# EAGLE board triangulator-lm324 (EAGLE 7.6.0)
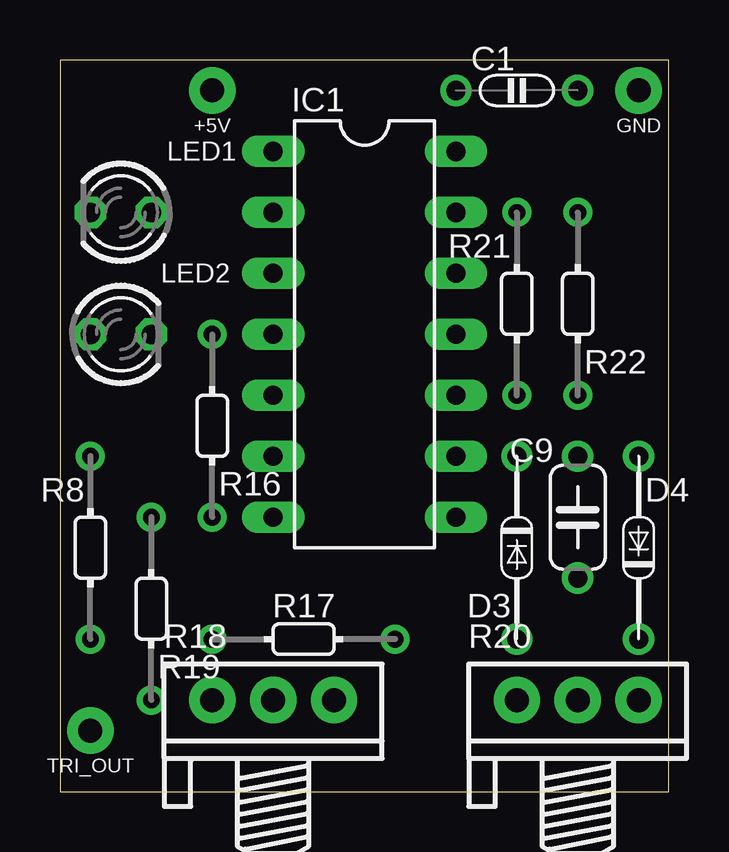
[diagram p0: board, top side]
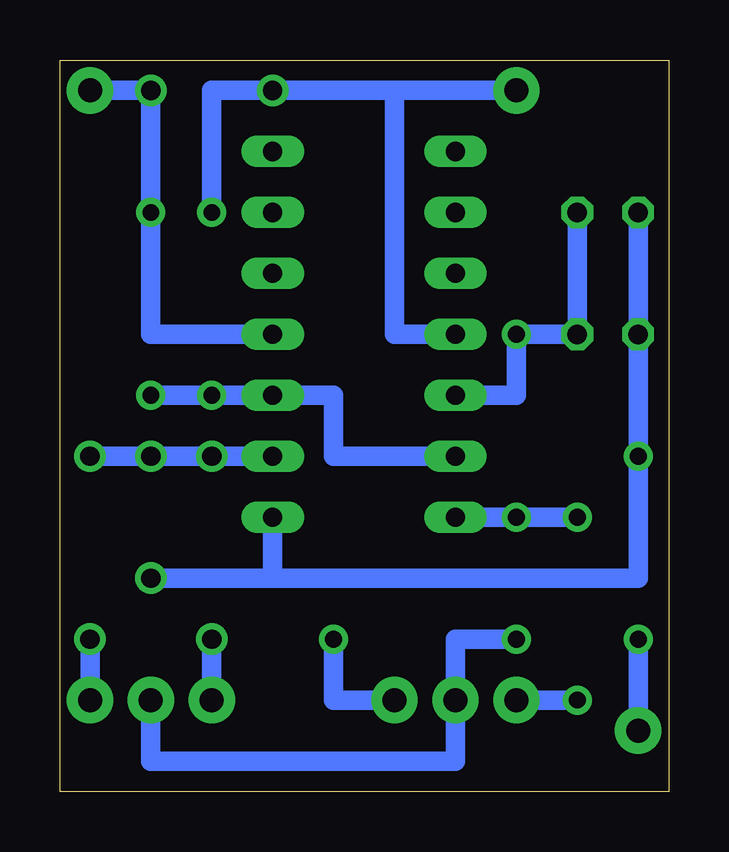
[diagram p1: board, bottom side, seen from below]

Size 25.38 x 30.48 mm. Coordinates in mm from the lower left corner, seen from the top.
Outline: 0,0 25.38,0 25.38,30.48 0,30.48 0,0
Copper layers (1*16): Top 0.035mm / dielectric 1.5mm / Bottom 0.035mm
Design rules "default": minimum track width 10mil, minimum drill 24mil, track to track 8mil, track to pad 8mil, pad to pad 8mil, via to via 8mil, smd to smd 8mil, copper to edge 40mil, drill to drill 8mil, minimum pad ring 10mil, minimum via ring 8mil, stop-mask expansion 4mil, vias tented up to drill 0mil, thermal gap 10mil

## Footprints (pad centres in the part's own frame; a part is rotated, then mirrored left to right if it is on the bottom)
SPAD = drill 1 pad 1.93: 1 0,0
C050-020X036 = drill 0.8: 1 -2.54,0; 2 2.54,0
C050-024X044/V = drill 0.8: 1 0,2.54; 2 0,-2.54
DO34-7V = drill 0.8: A 0,3.81; C 0,-3.81
DIL14 = drill 0.8 long: 1 -3.81,7.62; 2 -3.81,5.08; 3 -3.81,2.54; 4 -3.81,0; 5 -3.81,-2.54; 6 -3.81,-5.08; 7 -3.81,-7.62; 8 3.81,-7.62; 9 3.81,-5.08; 10 3.81,-2.54; 11 3.81,0; 12 3.81,2.54; 13 3.81,5.08; 14 3.81,7.62
LED3MM = drill 0.813 octagon: A -1.27,0; K 1.27,0
0202/7-V = drill 0.7: 1 0,-3.81; 2 0,3.81
0202/7 = drill 0.7: 1 0,3.81; 2 0,-3.81
POT = drill 1 pad 1.93: 1 -2.54,0; 2 0,0; 3 2.54,0

## Placement (x,y rotation side)
+5V  VCC  [SPAD]  6.35,29.21 90 top
C1  100nF  [C050-020X036]  19.05,29.21 0 top
C9  1uF  [C050-024X044/V]  21.59,11.43 0 top
D3  1N4148  [DO34-7V]  19.05,10.16 180 top
D4  1N4148  [DO34-7V]  24.13,10.16 0 top
GND  GND  [SPAD]  24.13,29.21 90 top
IC1  LM324  [DIL14]  12.7,19.05 0 top
LED1  [LED3MM]  2.54,24.13 180 top
LED2  [LED3MM]  2.54,19.05 0 top
R8  1k  [0202/7-V]  1.27,10.16 0 top
R16  47k  [0202/7-V]  6.35,15.24 180 top
R17  4.7k  [0202/7]  10.16,6.35 270 top
R18  10k  [POT]  8.89,3.81 0 top
R19  4.7k  [0202/7-V]  3.81,7.62 180 top
R20  100k  [POT]  21.59,3.81 0 top
R21  100k  [0202/7-V]  19.05,20.32 0 top
R22  100k  [0202/7-V]  21.59,20.32 180 top
TRI_OUT  TRIANGLE  [SPAD]  1.27,2.54 90 top

## Library data of the parts
+5V GND TRI_OUT = pad
C1 C9 = c
D3 D4 = d
IC1 = ic
LED1 LED2 = led
R8 R16-R22 = r

## Nets
GND: C1.2 GND.1 IC1.11 R22.1
N$14: IC1.7 R16.2 R19.1
N$15: IC1.5 LED1.A LED2.K R16.1
N$22: D3.A R20.1
N$23: D4.C R20.3
N$24: R17.2 R18.2 R20.2
N$25: R17.1 R18.3
N$26: C9.1 D3.C D4.A IC1.9
N$27: R18.1 R19.2
N$28: C9.2 IC1.8 LED1.K LED2.A R8.2
N$29: R8.1 TRI_OUT.1
N$30: IC1.6 IC1.10 R21.1 R22.2
VCC: +5V.1 C1.1 IC1.4 R21.2

## Tracks (layer width: path | path; a pad name or v marks a point on that pad's centre or on a via)
GND
  Bottom 0.813: IC1.11 21.59,19.05 R22.1 C1.2 GND.1
N$14
  Bottom 0.813: IC1.7 R19.1 R16.2
N$15
  Bottom 0.813: LED1.A LED2.K R16.1 6.35,16.51 IC1.5
N$22
  Bottom 0.813: D3.A R20.1
N$23
  Bottom 0.813: D4.C R20.3
N$24
  Bottom 0.813: R17.2 8.89,6.35 R18.2 8.89,1.27 21.59,1.27 R20.2
N$25
  Bottom 0.813: R17.1 13.97,3.81 R18.3
N$26
  Bottom 0.813: IC1.9 D3.C D4.A C9.1
N$27
  Bottom 0.813: R18.1 R19.2
N$28
  Bottom 0.813: 16.51,8.89 1.27,8.89 R8.2 LED1.K LED2.A | C9.2 16.51,8.89 | 16.51,8.89 IC1.8
N$29
  Bottom 0.813: TRI_OUT.1 R8.1
N$30
  Bottom 0.813: IC1.6 13.97,13.97 13.97,16.51 IC1.10 R21.1 R22.2
VCC
  Bottom 0.813: 11.43,29.21 11.43,19.05 IC1.4 | R21.2 19.05,29.21 C1.1 | C1.1 13.97,29.21 | 11.43,29.21 +5V.1 | 11.43,29.21 C1.1